# Altium PCB Motherboard.PcbDoc (part 4 of 5)
Units mm, origin at the board's own origin, x right, y up, seen from the top; angles counter-clockwise.
Board outline 133.86 x 67.84 mm, 4 copper layers (Top Layer, Power Plane, Ground Plane, Bottom Layer), stack 1.586 mm thick; 260 components, 155 nets, 877 pads, 1037 vias.
Unrouted connection lines stored in the file: 43.
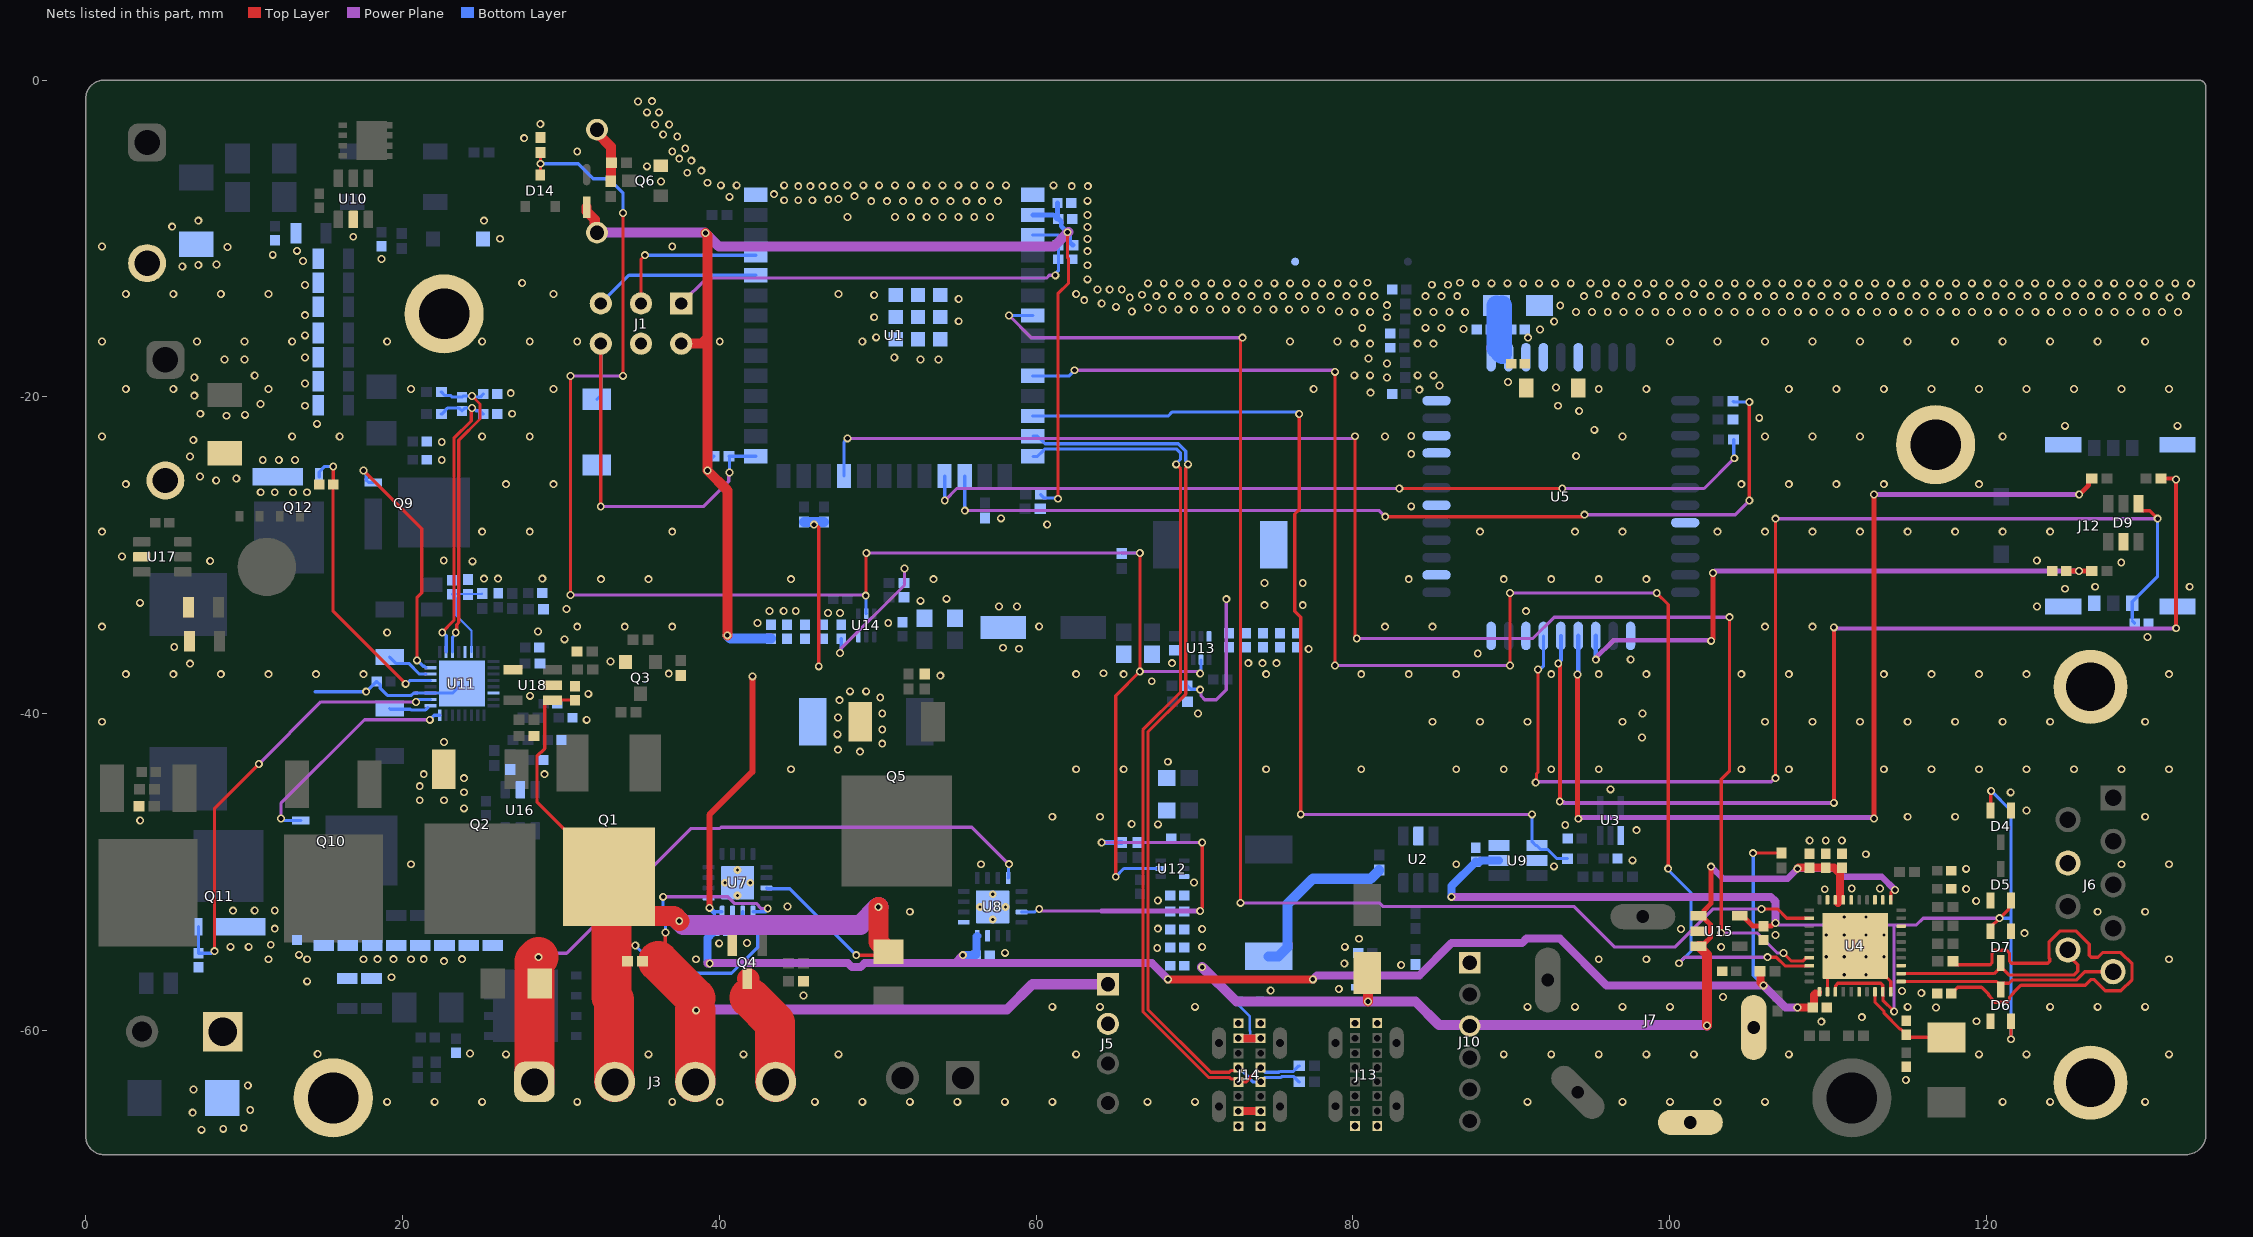
[diagram p4: the nets of this part, all layers, seen from the top]

## Via types
v1: diameter 0.5, hole 0.3, Top Layer to Bottom Layer, tented both sides, 988 vias
v2: diameter 1.2, hole 0.8, Top Layer to Bottom Layer, tented both sides, 29 vias
v3: diameter 0.5, hole 0.2, Top Layer to Bottom Layer, 20 vias

## Nets (pads, with @x,y where several pads share a name; then routed paths per layer and width w, separated by ;. In a path a pad name is that pad's centre, name@x,y a point inside that pad or via, vN(x,y) a via of type N, cw(c..) or ccw(c..) an arc to the next point about the centre after c; other vN are vias at no path point) (continued)
DGND: (continued)
  other v1: 7.304,-66.274 8.676,-66.212 9.971,-66.147 6.747,-65.191 10.378,-65.021 19.025,-64.505 22.025,-64.505 25.025,-64.505 31.025,-64.505 37.025,-64.505 40.025,-64.505 46.025,-64.505 49.025,-64.505 52.025,-64.505 55.025,-64.505 58.025,-64.505 61.025,-64.505 67.025,-64.505 70.025,-64.505 91.025,-64.505 97.025,-64.505 100.025,-64.505 103.025,-64.505 106.025,-64.505 121.025,-64.505 124.025,-64.505 130.025,-64.505 6.796,-63.734 10.225,-63.48 114.909,-63.127 26.525,-61.505 35.525,-61.505 41.525,-61.505 47.525,-61.505 62.525,-61.505 89.525,-61.505 92.525,-61.505 95.525,-61.505 98.525,-61.505 101.525,-61.505 107.525,-61.505 119.525,-61.505 122.525,-61.505 131.525,-61.505 14.634,-61.482 24.248,-61.448 109.575,-59.444 119.371,-59.416 112.132,-59.162 116.814,-58.555 61.025,-58.505 64.025,-58.505 70.025,-58.505 91.025,-58.505 94.025,-58.505 97.025,-58.505 100.025,-58.505 115.025,-58.505 124.025,-58.505 127.025,-58.505 130.025,-58.505 103.369,-57.892 45.313,-57.793 115.891,-57.632 114.672,-57.511 74.805,-57.469 79.112,-57.384 13.974,-56.896 19.304,-56.642 83.049,-55.86 79.458,-55.766 22.606,-55.626 11.525,-55.505 13.974,-55.505 17.525,-55.505 18.415,-55.499 19.431,-55.499 20.525,-55.505 21.336,-55.499 23.749,-55.499 38.525,-55.505 95.525,-55.505 98.525,-55.505 131.525,-55.505 13.453,-55.225 58.03,-55.098 67.645,-54.798 103.251,-54.737 9.135,-54.717 10.278,-54.717 79.493,-54.717 11.675,-54.59 39.986,-54.496 41.74,-54.482 80.382,-54.209 106.68,-53.975 122.402,-53.856 100.711,-53.594 11.929,-53.574 67.682,-53.574 52.025,-52.505 127.025,-52.505 130.025,-52.505 9.286,-52.435 10.659,-52.431 11.929,-52.431 44.308,-52.175 119.354,-51.824 67.682,-51.796 109.79,-51.084 118.719,-51.062 111.497,-51.034 113.275,-51.034 69.968,-50.653 118.719,-49.792 92.701,-49.637 20.525,-49.505 56.525,-49.505 86.525,-49.505 128.525,-49.505 131.525,-49.505 97.654,-49.256 112.386,-48.875 108.839,-48.006 109.855,-48.006 110.871,-48.006 97.908,-47.351 93.407,-47.027 67.699,-46.984 66.031,-46.97 3.429,-46.736 61.025,-46.505 64.025,-46.505 115.025,-46.505 118.025,-46.505 130.025,-46.505 122.529,-46.109 23.876,-45.974 21.082,-45.466 22.606,-45.466 23.876,-44.958 121.53,-44.963 96.272,-44.776 21.082,-44.577 23.876,-44.069 21.336,-43.815 28.956,-43.815 44.525,-43.505 62.525,-43.505 65.525,-43.505 74.525,-43.505 80.525,-43.505 86.525,-43.505 89.525,-43.505 92.525,-43.505 95.525,-43.505 104.525,-43.505 107.525,-43.505 113.525,-43.505 116.525,-43.505 119.525,-43.505 122.525,-43.505 125.525,-43.505 128.525,-43.505 131.525,-43.505 68.317,-43.033 48.886,-42.398 47.489,-42.271 50.283,-41.89 22.606,-41.783 98.254,-41.507 47.454,-41.301 50.283,-41.001 1.025,-40.505 85.025,-40.505 88.025,-40.505 91.025,-40.505 97.025,-40.505 106.025,-40.505 109.025,-40.505 112.025,-40.505 115.025,-40.505 118.025,-40.505 121.025,-40.505 124.025,-40.505 130.025,-40.505 31.623,-40.386 47.489,-40.239 50.283,-39.985 70.222,-39.985 98.289,-39.985 47.586,-39.143 50.156,-38.969 28.041,-38.87 31.724,-38.743 48.251,-38.588 49.267,-38.588 67.301,-37.953 53.949,-37.6 2.525,-37.505 5.525,-37.505 8.525,-37.505 11.525,-37.505 14.525,-37.505 17.525,-37.505 62.525,-37.505 65.525,-37.505 74.525,-37.505 80.525,-37.505 83.525,-37.505 86.525,-37.505 92.525,-37.505 95.525,-37.505 98.525,-37.505 104.525,-37.505 107.525,-37.505 113.525,-37.505 116.525,-37.505 119.525,-37.505 122.525,-37.505 131.525,-37.505 36.804,-37.473 64.253,-37.445 6.578,-36.838 68.571,-36.81 73.397,-36.81 74.286,-36.81 75.175,-36.81 33.121,-36.711 97.536,-36.576 87.884,-36.195 77.207,-35.921 58.924,-35.897 57.908,-35.834 5.579,-35.794 30.226,-35.306 130.166,-35.159 19.025,-34.875 28.549,-34.806 1.025,-34.505 31.025,-34.505 34.025,-34.505 37.025,-34.505 82.025,-34.505 85.025,-34.505 106.025,-34.505 109.025,-34.505 60.194,-34.5 42.409,-34.27 50.664,-34.27 46.854,-33.635 47.616,-33.635 90.932,-33.528 43.171,-33.508 44.06,-33.508 44.822,-33.508 30.344,-33.381 57.654,-33.23 58.797,-33.23 123.186,-33.23 3.42,-33 52.696,-32.873 54.347,-32.746 124.959,-32.111 126.864,-31.984 132.833,-31.984 32.525,-31.505 35.525,-31.505 44.525,-31.505 53.525,-31.505 83.525,-31.505 89.525,-31.505 92.525,-31.505 95.525,-31.505 98.525,-31.505 25.137,-31.476 26.026,-31.476 28.82,-31.476 128.515,-30.46 24.42,-30.377 7.848,-30.361 22.597,-30.333 123.181,-30.333 2.277,-30.079 1.025,-28.505 25.025,-28.505 28.025,-28.505 37.025,-28.505 88.025,-28.505 94.025,-28.505 97.025,-28.505 103.025,-28.505 106.025,-28.505 109.025,-28.505 112.025,-28.505 115.025,-28.505 118.025,-28.505 121.025,-28.505 124.025,-28.505 60.697,-28.047 57.776,-27.666 83.684,-26.904 11.04,-26.015 11.929,-26.015 13.072,-26.015 13.961,-26.015 2.525,-25.505 26.525,-25.505 29.525,-25.505 104.525,-25.505 107.525,-25.505 110.525,-25.505 113.525,-25.505 119.525,-25.505 8.229,-25.281 9.499,-25.154 7.213,-25.027 11.167,-23.983 12.183,-23.983 13.199,-23.983 22.47,-23.983 6.578,-23.757 94.098,-23.729 83.684,-23.602 22.47,-22.84 6.788,-22.71 1.025,-22.505 13.025,-22.505 16.025,-22.505 25.025,-22.505 28.025,-22.505 82.025,-22.505 97.025,-22.505 106.025,-22.505 109.025,-22.505 112.025,-22.505 121.025,-22.505 83.684,-22.459 95.241,-22.078 124.959,-21.824 132.071,-21.824 14.596,-21.697 105.655,-21.316 8.881,-21.189 10.056,-21.129 7.23,-21.062 26.915,-21.062 94.286,-20.893 13.834,-20.554 92.955,-20.554 11.028,-20.448 6.849,-19.919 26.83,-19.764 81.11,-19.731 84.192,-19.538 2.525,-19.505 5.525,-19.505 11.525,-19.505 20.525,-19.505 29.525,-19.505 77.525,-19.505 95.525,-19.505 98.525,-19.505 107.525,-19.505 110.525,-19.505 113.525,-19.505 116.525,-19.505 119.525,-19.505 122.525,-19.505 125.525,-19.505 128.525,-19.505 131.525,-19.505 92.828,-19.411 85.462,-19.284 13.834,-19.157 6.849,-18.776 82.16,-18.776 10.659,-18.649 80.09,-18.637 81.09,-18.637 84.09,-18.637 85.09,-18.637 82.16,-17.887 8.754,-17.633 10.024,-17.633 52.696,-17.633 53.839,-17.633 80.983,-17.572 13.834,-17.506 51.045,-17.506 80.09,-16.637 81.09,-16.637 84.09,-16.637 85.09,-16.637 1.025,-16.505 7.025,-16.505 10.025,-16.505 13.025,-16.505 19.025,-16.505 25.025,-16.505 28.025,-16.505 31.025,-16.505 40.025,-16.505 49.025,-16.505 76.025,-16.505 79.025,-16.505 100.025,-16.505 103.025,-16.505 106.025,-16.505 109.025,-16.505 112.025,-16.505 115.025,-16.505 118.025,-16.505 121.025,-16.505 124.025,-16.505 127.025,-16.505 130.025,-16.505 91.059,-16.256 49.902,-16.236 13.834,-16.109 91.821,-15.748 86.991,-15.704 80.59,-15.637 84.59,-15.637 85.59,-15.637 92.71,-15.24 55.109,-15.22 49.775,-14.966 82.16,-14.966 13.834,-14.839 80.09,-14.637 81.09,-14.637 84.09,-14.637 85.09,-14.637 86.09,-14.637 87.09,-14.637 94.09,-14.637 95.09,-14.637 96.09,-14.637 97.09,-14.637 98.09,-14.637 99.09,-14.637 100.09,-14.637 101.09,-14.637 102.09,-14.637 103.09,-14.637 104.09,-14.637 105.09,-14.637 106.09,-14.637 107.09,-14.637 108.09,-14.637 109.09,-14.637 110.09,-14.637 111.09,-14.637 112.09,-14.637 113.09,-14.637 114.09,-14.637 115.09,-14.637 116.09,-14.637 117.09,-14.637 118.09,-14.637 119.09,-14.637 120.09,-14.637 121.09,-14.637 122.09,-14.637 123.09,-14.637 124.09,-14.637 125.09,-14.637 126.09,-14.637 127.09,-14.637 128.09,-14.637 129.09,-14.637 130.09,-14.637 131.09,-14.637 132.09,-14.637 66.04,-14.605 79.121,-14.605 67.978,-14.478 68.978,-14.478 69.978,-14.478 70.978,-14.478 71.978,-14.478 72.978,-14.478 73.978,-14.478 74.978,-14.478 75.978,-14.478 76.978,-14.478 77.978,-14.478 67.056,-14.351 65.043,-14.312 93.091,-14.224 82.16,-14.204 64.135,-14.097 63.04,-13.888 55.109,-13.823 65.913,-13.716 131.572,-13.716 67.59,-13.637 68.59,-13.637 69.59,-13.637 70.59,-13.637 71.59,-13.637 72.59,-13.637 73.59,-13.637 74.59,-13.637 75.59,-13.637 76.59,-13.637 77.59,-13.637 78.59,-13.637 79.59,-13.637 80.59,-13.637 81.364,-13.635 84.59,-13.637 85.59,-13.637 86.59,-13.637 94.59,-13.637 96.59,-13.637 97.59,-13.637 99.59,-13.637 100.59,-13.637 102.59,-13.637 103.59,-13.637 104.59,-13.637 105.59,-13.637 106.59,-13.637 107.59,-13.637 108.59,-13.637 109.59,-13.637 110.59,-13.637 111.59,-13.637 112.59,-13.637 113.59,-13.637 114.59,-13.637 115.59,-13.637 116.59,-13.637 117.59,-13.637 118.59,-13.637 119.59,-13.637 120.59,-13.637 121.59,-13.637 122.59,-13.637 123.59,-13.637 124.59,-13.637 125.59,-13.637 126.59,-13.637 127.59,-13.637 128.59,-13.637 129.59,-13.637 130.59,-13.637 132.59,-13.637 49.775,-13.569 66.677,-13.55 2.525,-13.505 5.525,-13.505 8.525,-13.505 11.525,-13.505 29.525,-13.505 47.525,-13.505 62.525,-13.505 95.525,-13.505 98.525,-13.505 101.525,-13.505 63.881,-13.208 64.643,-13.208 65.405,-13.208 13.834,-12.934 84.985,-12.917 86.001,-12.917 67.056,-12.827 68.056,-12.827 69.056,-12.827 70.056,-12.827 71.056,-12.827 72.056,-12.827 73.056,-12.827 74.041,-12.827 75.041,-12.827 76.041,-12.827 77.041,-12.827 78.041,-12.827 79.041,-12.827 80.041,-12.827 87.757,-12.827 88.757,-12.827 89.757,-12.827 90.757,-12.827 91.757,-12.827 92.757,-12.827 93.757,-12.827 94.996,-12.827 95.996,-12.827 96.996,-12.827 97.996,-12.827 98.996,-12.827 99.996,-12.827 100.996,-12.827 102.108,-12.827 103.108,-12.827 104.108,-12.827 105.108,-12.827 106.108,-12.827 107.108,-12.827 108.108,-12.827 108.966,-12.827 109.966,-12.827 110.966,-12.827 111.966,-12.827 112.966,-12.827 113.966,-12.827 114.966,-12.827 116.078,-12.827 117.078,-12.827 118.078,-12.827 119.078,-12.827 120.078,-12.827 121.078,-12.827 122.078,-12.827 123.063,-12.827 124.063,-12.827 125.063,-12.827 126.063,-12.827 127.063,-12.827 128.063,-12.827 129.063,-12.827 129.921,-12.827 130.921,-12.827 131.921,-12.827 132.921,-12.827 27.55,-12.807 80.921,-12.79 86.763,-12.79 63.246,-12.573 6.092,-11.767 63.246,-11.684 7.103,-11.664 8.251,-11.64 13.707,-11.41 18.66,-11.283 11.802,-11.029 63.246,-10.795 13.326,-10.775 8.951,-10.535 1.025,-10.505 37.025,-10.505 63.246,-10.033 26.153,-10.013 16.882,-9.886 63.246,-9.271 5.452,-9.251 7.103,-8.87 25.137,-8.87 48.09,-8.637 51.09,-8.637 52.09,-8.637 53.09,-8.637 54.09,-8.637 55.09,-8.637 56.09,-8.637 57.09,-8.637 63.246,-8.509 49.59,-7.637 50.59,-7.637 51.59,-7.637 52.59,-7.637 53.59,-7.637 54.59,-7.637 55.59,-7.637 56.59,-7.637 57.59,-7.637 63.246,-7.62 44.089,-7.579 44.978,-7.579 45.867,-7.579 46.872,-7.546 47.525,-7.505 40.64,-7.366 48.534,-7.325 43.454,-7.198 44.978,-6.69 45.74,-6.69 46.502,-6.69 47.264,-6.69 62.25,-6.69 63.266,-6.69 40.09,-6.637 41.09,-6.637 44.09,-6.637 48.09,-6.637 49.09,-6.637 50.09,-6.637 51.09,-6.637 52.09,-6.637 53.09,-6.637 54.09,-6.637 55.09,-6.637 56.09,-6.637 57.09,-6.637 58.09,-6.637 61.09,-6.637 39.243,-6.477 36.315,-6.395 37.973,-5.842 38.862,-5.715 35.424,-5.441 38.227,-5.08 37.465,-4.953 31.025,-4.505 37.025,-4.505 37.846,-4.318 27.677,-3.663 37.338,-3.556 36.449,-3.429 35.941,-2.794 36.83,-2.794 28.693,-2.774 35.433,-2.032 36.195,-2.032 34.863,-1.345 35.752,-1.327
  other v3: 111.028,-56.485 112.398,-56.485 109.888,-55.345 113.538,-55.345 109.888,-53.975 111.028,-53.975 112.398,-53.975 113.538,-53.975 57.258,-52.997 111.028,-52.835 112.398,-52.835 56.458,-52.197 58.058,-52.197 41.148,-51.473 57.258,-51.397 40.348,-50.673 41.948,-50.673 41.148,-49.873
ESP32_EN: C1.2 J1.1 R1.1 U1.3 | length 28.6
  Power Plane w0.203: J1.1@37.592,-14.097 39.192,-12.497 60.655,-12.497 60.833,-12.319 v1(61.214,-12.319)
  Bottom Layer w0.203: U1.3@59.791,-9.779 61.409,-9.779 61.409,-10.16 61.409,-10.414 61.409,-10.922 C1.2@61.409,-11.303 61.409,-12.044 61.214,-12.239 v1(61.214,-12.319)
ESP32_IO0: J1.6 R2.1 S2.1 U1.27 | length 25.9
  Top Layer w0.203: v1(32.512,-26.924) J1.6@32.512,-16.637
  Power Plane w0.203: v1(32.512,-26.924) 38.989,-26.924 40.593,-25.32 40.593,-24.812 v1(40.64,-24.765)
  Bottom Layer w0.203: S2.1@32.273,-20.15 32.512,-19.911 J1.6@32.512,-16.637 ; v1(40.64,-24.765) 40.64,-23.782 R2.1@40.607,-23.749 U1.27@42.291,-23.749
FAN+: J3.3 J5.1 R13.1 U7.1 | length 46.5
  Top Layer w0.203: 36.146,-55.626 36.576,-55.196 36.576,-53.839 v1(36.603,-53.812)
  Top Layer w2.54: 36.146,-55.626 38.481,-57.961 ; J3.3@38.481,-63.246 v1@38.481,-58.727
  Power Plane w0.203: v1(36.449,-51.562) 40.524,-51.562 40.939,-51.977 42.325,-51.977 42.651,-52.303 v1(43.053,-52.303)
  Power Plane w0.635: v1(38.533,-58.727) 38.809,-58.727 38.862,-58.674 58.166,-58.674 59.757,-57.083 J5.1@64.533,-57.083
  Bottom Layer w0.203: v1(36.449,-51.562) 36.449,-52.845 36.603,-52.998 v1(36.603,-53.812) ; U7.1@42.123,-52.498 v1@42.934,-52.498
FAN-: J3.4 Q4.3 | length 7.3
  Top Layer w1.27: Q4.3@41.749,-56.737 41.895,-56.737 41.91,-56.752 41.91,-57.912
  Top Layer w2.54: 41.91,-57.912 43.511,-59.513 43.511,-63.196 J3.4@43.561,-63.246
GSM_CLK: R42.2 U5.16 | length 65.3
  Top Layer w0.3: v1(94.174,-37.528) 94.174,-46.676 94.231,-46.733 v1(94.231,-46.635) ; v1(112.903,-46.609) v1(112.903,-26.162) ; v1(125.857,-26.162) 126.452,-25.567 126.452,-25.321 126.627,-25.146 R42.2@126.652,-25.146
  Power Plane w0.3: v1(94.231,-46.635) 94.269,-46.596 94.411,-46.596 94.449,-46.558 112.852,-46.558 v1(112.903,-46.609) ; v1(112.903,-26.162) v1(125.857,-26.162)
  Bottom Layer w0.3: v1(94.174,-37.528) 94.234,-37.467 94.234,-37.465 94.229,-37.46 U5.16@94.229,-35.088
GSM_DATA: C21.2 R41.2 U5.15 | length 38.7
  Top Layer w0.3: v1@102.642,-35.367 102.642,-35.407 102.743,-35.306 v1(102.743,-31.115) ; C21.2@124.968,-30.988 C21.2@125.027,-30.988 v1(125.84,-30.988) R41.2@126.652,-30.988
  Power Plane w0.3: v1(95.337,-36.589) 95.324,-36.576 95.25,-36.576 96.459,-35.367 v1@102.642,-35.367 ; v1(102.743,-31.115) 102.87,-30.988 v1(125.84,-30.988)
  Bottom Layer w0.3: U5.15@95.329,-35.088 95.333,-35.092 95.333,-36.585 v1(95.337,-36.589)
  other v1: 102.619,-35.396
GSM_RST: R43.2 U5.17 | length 71.2
  Top Layer w0.254: v1(92.964,-36.83) 92.964,-36.897 93.062,-36.994 v1(93.062,-45.538) ; v1(110.363,-45.629) 110.327,-45.593 110.236,-45.593 110.363,-45.466 v1(110.363,-34.544) ; R43.2@131.031,-25.146 131.901,-25.146 v1(131.972,-25.217) 131.972,-34.525 131.953,-34.544 131.953,-34.58 v1(131.979,-34.606)
  Power Plane w0.254: v1(93.062,-45.538) 93.109,-45.585 93.283,-45.585 93.326,-45.629 v1(110.363,-45.629) ; v1(110.363,-34.544) 110.425,-34.606 v1(131.979,-34.606)
  Bottom Layer w0.254: v1(92.964,-36.83) 92.964,-36.763 93.129,-36.598 U5.17@93.129,-35.088
GSM_RX: R38.2 U1.18 | length 53.8
  Top Layer w0.203: v1(82.931,-25.781) v1(93.218,-25.781)
  Power Plane w0.203: v1(54.229,-26.543) 54.991,-25.781 v1(82.931,-25.781) ; v1(93.218,-25.781) 102.174,-25.781 v1(104.085,-23.87)
  Bottom Layer w0.203: U1.18@54.216,-24.999 54.229,-25.012 v1(54.229,-26.543) ; R38.2@104.042,-22.692 104.042,-23.847 104.013,-23.876 104.079,-23.876 v1(104.085,-23.87)
GSM_TX: R36.2 U1.17 | length 59.6
  Top Layer w0.203: v1(82.042,-27.559) 94.488,-27.559 v1(94.615,-27.432) ; v1(105.029,-26.543) v1(105.029,-20.32)
  Power Plane w0.203: v1(55.499,-27.178) 81.661,-27.178 v1(82.042,-27.559) ; v1(94.615,-27.432) 104.14,-27.432 v1(105.029,-26.543)
  Bottom Layer w0.203: U1.17@55.486,-24.999 55.486,-27.165 v1(55.499,-27.178) ; R36.2@104.009,-20.279 104.05,-20.32 v1(105.029,-20.32)
GSM_VCC: C98.2 D9.4 J12.S1 U5.18 | length 74.2
  Top Layer w0.203: v1(91.538,-44.335) 91.592,-44.281 91.592,-43.781 91.694,-43.679 v1(91.694,-37.211) ; v1(106.68,-44.069) v1(106.68,-27.686) ; D9.4@129.601,-26.74 129.601,-26.965 129.824,-27.188 130.312,-27.188 v1(130.81,-27.686)
  Power Plane w0.203: v1(91.538,-44.335) 91.575,-44.298 106.413,-44.298 106.641,-44.069 v1(106.68,-44.069) ; v1(106.68,-27.686) v1(130.81,-27.686)
  Bottom Layer w0.203: v1(91.694,-37.211) 91.821,-37.211 92.029,-37.003 U5.18@92.029,-35.088 ; C98.2@129.212,-33.983 J12.S1@129.212,-33.021 129.212,-32.921 130.81,-31.323 v1(130.81,-27.686) ; C98.2@129.227,-34.163 C98.2@129.354,-34.29
HEATER: J3.1 R46.1 U8.12 | length 43.9
  Top Layer w0.203: 28.399,-55.753 v1@28.639,-55.513 ; v1@28.677,-55.475 29.072,-55.08
  Top Layer w2.54: J3.1@28.321,-63.246 28.321,-56.896 28.321,-55.626 v1(28.575,-55.372)
  Power Plane w0.203: v1(28.575,-55.372) 28.588,-55.372 28.842,-55.118 30.353,-55.118 38.227,-47.244 40.032,-47.244 40.108,-47.168 55.931,-47.168 58.279,-49.516 58.279,-49.498 v1(58.284,-49.498)
  Bottom Layer w0.203: U8.12@58.233,-50.372 58.256,-50.349 58.256,-49.521 58.279,-49.498 v1(58.284,-49.498)
HIDRV1: Q9.4 U11.31 | length 15.6
  Top Layer w0.203: v1(17.526,-24.638) 21.209,-28.321 21.209,-32.363 20.904,-32.668 v1(20.904,-36.627)
  Bottom Layer w0.203: v1(17.526,-24.638) 17.698,-24.81 17.698,-25.252 17.846,-25.4 Q9.4@18.146,-25.4 ; v1(20.904,-36.627) 20.914,-36.627 21.29,-37.003 21.38,-37.003 U11.31@21.476,-37.098
HIDRV2: Q10.4 U11.24 | length 14.6
  Power Plane w0.203: v1(12.319,-46.609) 12.319,-45.663 17.596,-40.386 v1(21.717,-40.386)
  Bottom Layer w0.203: v1(12.319,-46.609) 12.399,-46.609 12.526,-46.736 Q10.4@13.574,-46.736 ; v1(21.717,-40.386) 22.003,-40.1 U11.24@22.349,-40.1
ILIM_HIZ: C64.1 R67.2 R69.1 U11.6 | length 6.1
  Bottom Layer w0.127: U11.6@24.349,-36.1 24.349,-34.755 23.36,-33.767 23.36,-32.69 C64.1@23.114,-32.444 24.993,-32.444 R67.2@25.019,-32.418
IN_N: D6.3 J6.5 U4.1 | length 14.1
  Top Layer w0.203: U4.1@114.613,-56.91 120.644,-56.91 D6.3@120.904,-57.17 ; D6.3@120.904,-57.42 D6.3@120.904,-57.17 ; J6.5@127.993,-56.286 126.213,-56.286 125.679,-56.82 121.628,-56.82 121.426,-57.022 121.052,-57.022 D6.3@120.904,-57.17
IN_P: D7.3 J6.9 U4.2 | length 13.5
  Top Layer w0.203: U4.2@114.613,-56.41 120.481,-56.41 D7.3@120.904,-55.987 ; D7.3@120.904,-55.737 D7.3@120.904,-55.987 ; J6.9@125.149,-54.915 125.149,-55.231 125.768,-55.851 125.768,-56.264 125.542,-56.49 121.407,-56.49 D7.3@120.904,-55.987
LODRV1: C41.2 Q12.4 U11.29 | length 18.6
  Top Layer w0.203: C41.2@15.612,-25.527 15.612,-33.528 20.193,-38.109 v1(20.193,-38.114) ; C41.2@15.621,-25.518 v1(15.621,-24.384)
  Bottom Layer w0.203: Q12.4@14.732,-25.038 14.732,-24.738 15.086,-24.384 v1(15.621,-24.384) ; v1(20.193,-38.114) 20.273,-38.114 20.487,-37.9 U11.29@21.749,-37.9
LODRV2: C42.2 Q11.4 U11.26 | length 28.3
  Top Layer w0.203: v1(8.128,-54.991) 8.128,-45.974 v1(10.922,-43.18) ; v1@20.824,-39.243 v1(20.839,-39.258)
  Power Plane w0.203: v1(10.922,-43.18) 14.844,-39.258 v1(20.839,-39.258)
  Bottom Layer w0.203: Q11.4@7.112,-53.448 C42.2@7.112,-55.118 7.921,-55.118 8.048,-54.991 v1(8.128,-54.991) ; v1(20.839,-39.258) 20.839,-39.232 20.971,-39.1 U11.26@21.749,-39.1
NetBUZ1_2: BUZ1.2 R34.1 R35.1 | length 3.6
  Top Layer w0.635: BUZ1.2@32.273,-3.124 32.273,-3.323 33.147,-4.197 R34.1@33.147,-6.383
NetC6_2: C6.2 U4.38 Y1.1 | length 6.2
  Top Layer w0.203: U4.38@112.963,-57.56 112.963,-58.226 113.538,-58.801 113.538,-58.907 114.541,-59.91 114.608,-59.91 114.935,-60.237 C6.2@114.935,-60.257 115.112,-60.434 Y1.1@117.475,-60.434
NetC7_2: C7.2 R28.1 | length 30.2
  Top Layer w0.203: C7.2@117.788,-57.658 117.808,-57.658 118.189,-57.277 119.696,-57.277 120.142,-57.723 120.142,-57.785 120.352,-57.995 120.352,-58.045 120.529,-58.222 121.279,-58.222 121.456,-58.045 121.456,-57.906 121.706,-57.655 121.706,-57.618 122.174,-57.15 126.238,-57.15 126.613,-56.775 126.782,-56.775 127.495,-57.489 128.491,-57.489 129.195,-56.784 129.195,-55.788 128.491,-55.084 127.33,-55.084 127.043,-55.372 126.611,-55.372 126.492,-55.253 126.492,-54.558 125.646,-53.713 124.651,-53.713 123.946,-54.417 123.946,-55.413 123.999,-55.466 123.999,-55.634 123.88,-55.753 121.575,-55.753 121.456,-55.634 121.456,-55.112 121.279,-54.935 120.529,-54.935 120.352,-55.112 120.352,-55.73 120.233,-55.849 118.101,-55.849 R28.1@117.878,-55.626